# Altium PCB SDC_V3.0.PcbDoc (part 3 of 4)
Units mm, origin at the board's own origin, x right, y up, seen from the top; angles counter-clockwise.
Board outline 130 x 100 mm, 4 copper layers (Top Layer, Ground Plane, Power Plane, Bottom Layer), stack 1.466 mm thick; 369 components, 219 nets, 1234 pads, 1046 vias.
Unrouted connection lines stored in the file: 2.
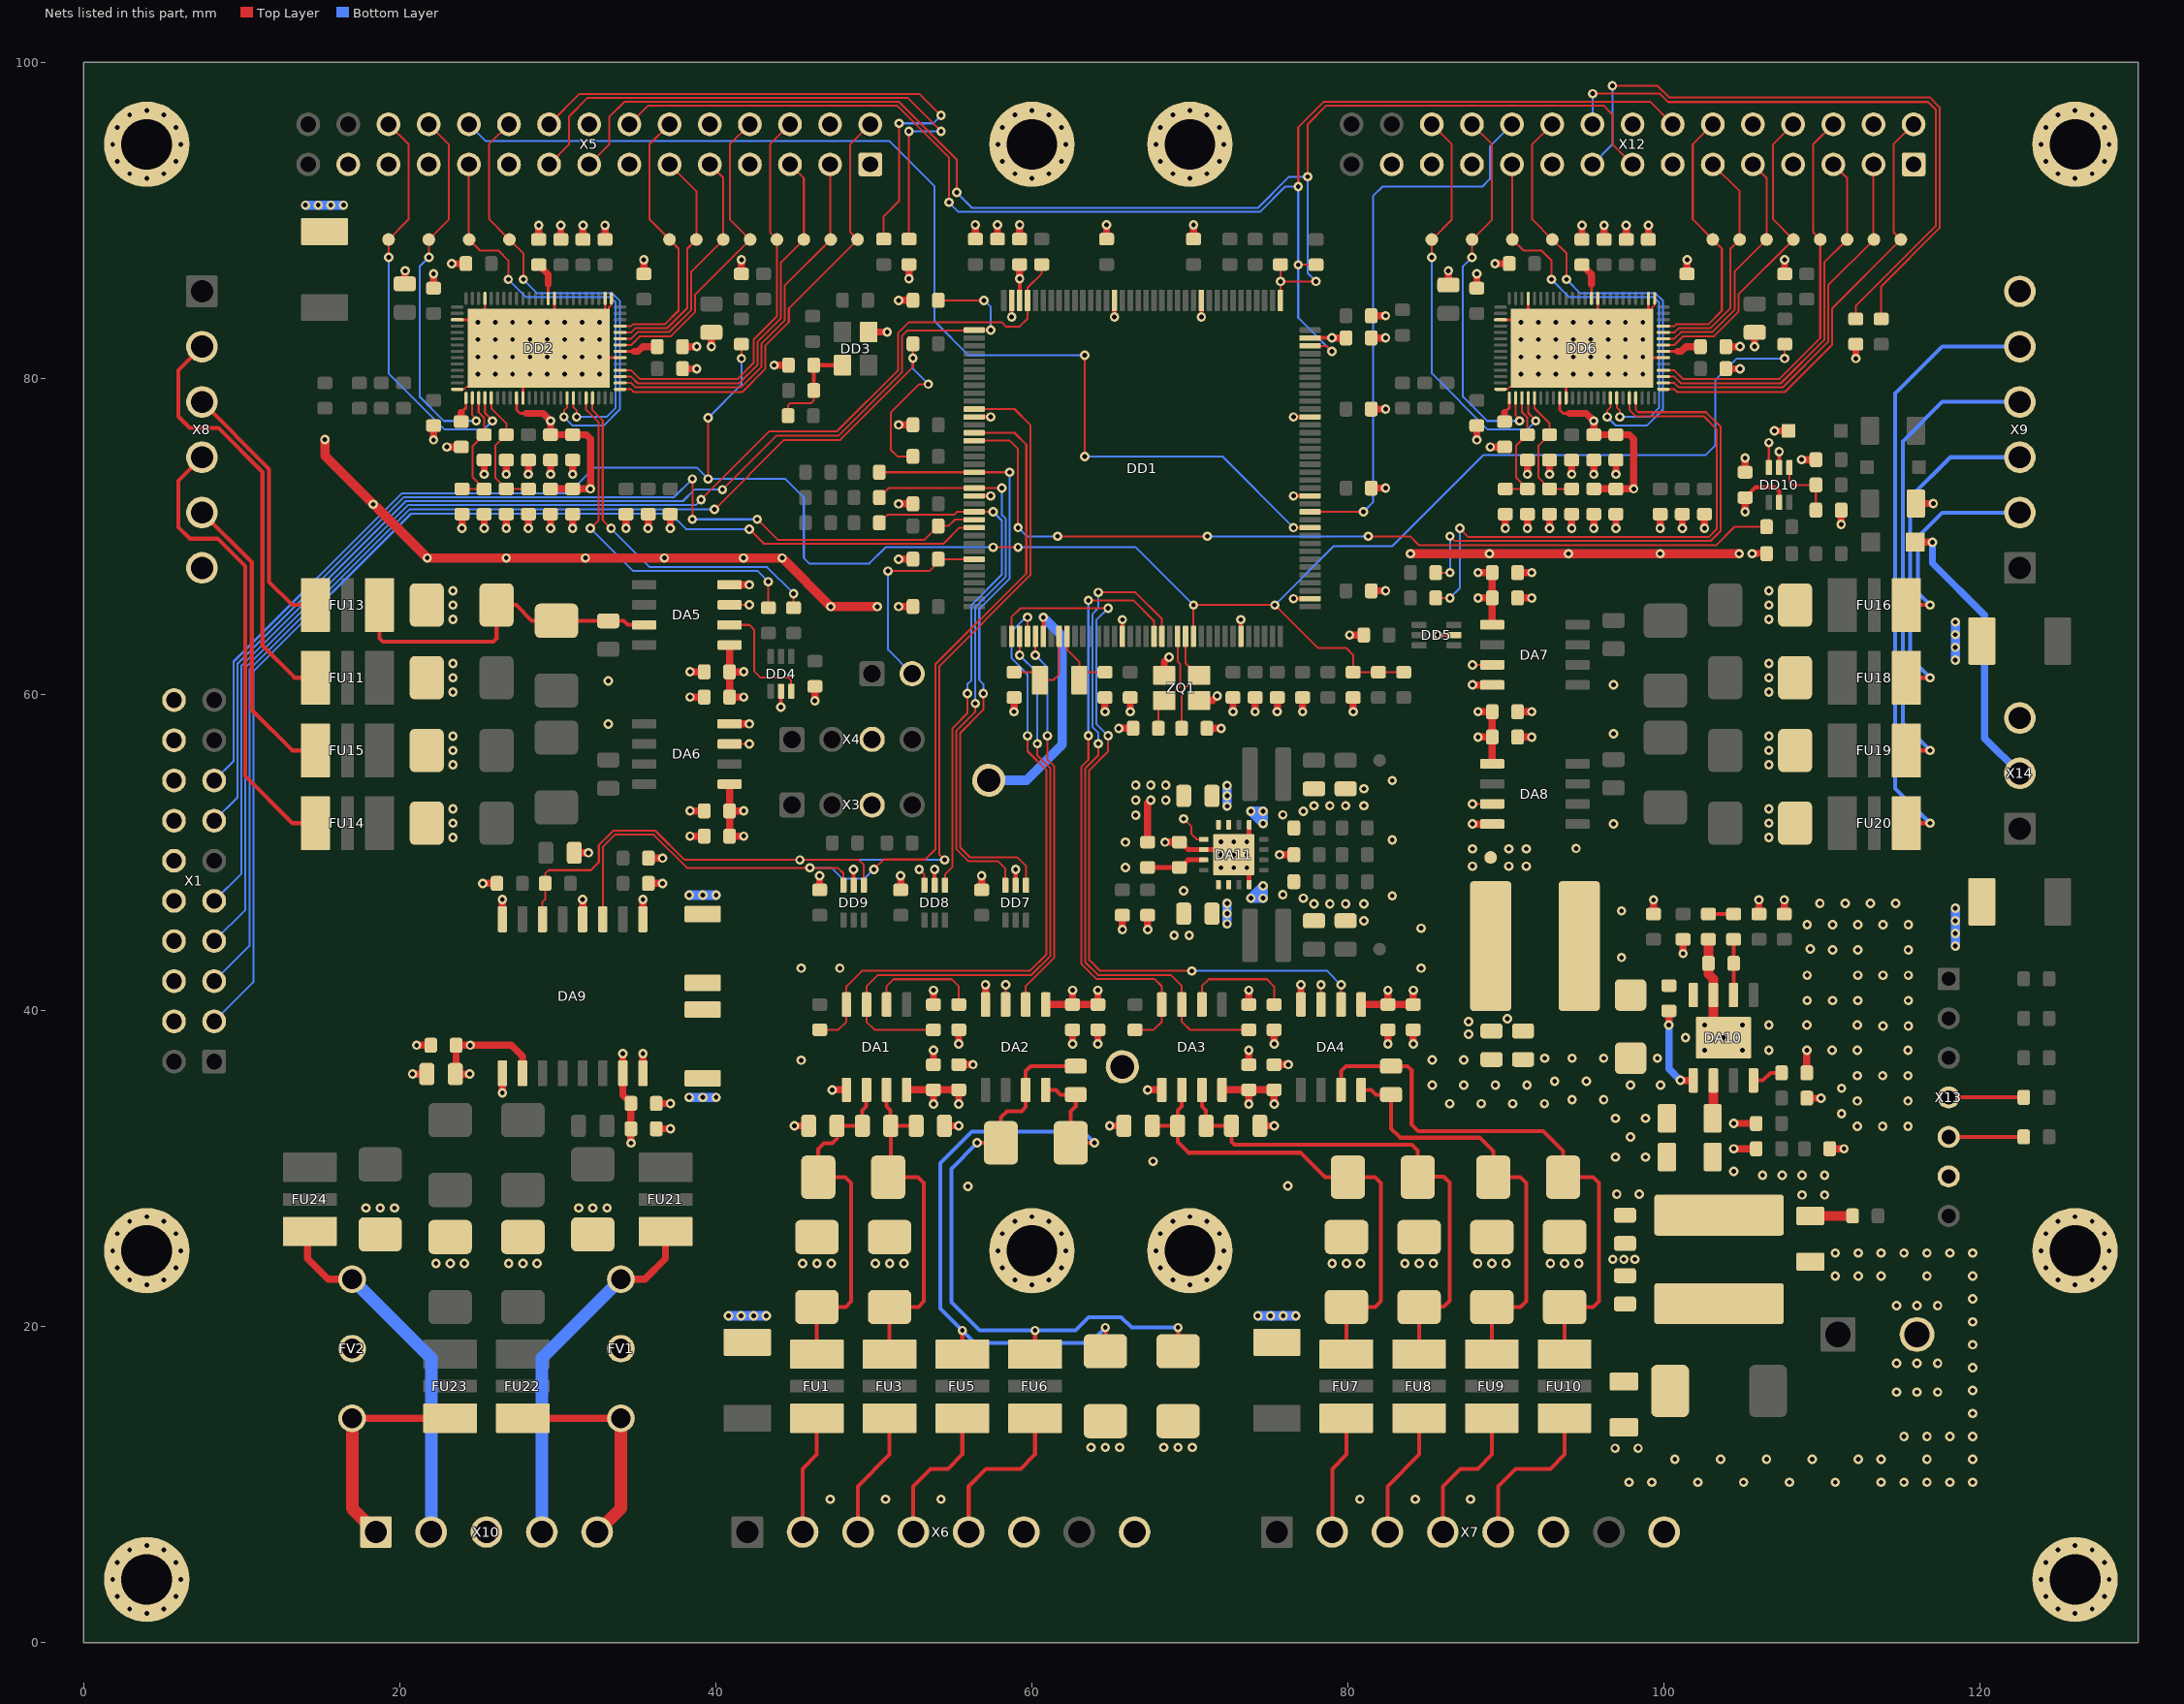
[diagram p4: the nets of this part, all layers, seen from the top]

## Via types
v1: diameter 0.6, hole 0.3, Top Layer to Bottom Layer, tented both sides, 989 vias
v2: diameter 0.6, hole 0.3, Top Layer to Bottom Layer, 57 vias

## Nets (pads, with @x,y where several pads share a name; then routed paths per layer and width w, separated by ;. In a path a pad name is that pad's centre, name@x,y a point inside that pad or via, vN(x,y) a via of type N, cw(c..) or ccw(c..) an arc to the next point about the centre after c; other vN are vias at no path point) (continued)
+5V: C44.2 C45.2 C46.2 C47.2 C48.2 C49.2 C50.2 C51.2 C52.2 C53.2 C55.2 C56.2 C57.2 C58.2 C60.2 C61.2 C79.2 C80.2 C84.2 C88.2 C113.2 DA1.8 DA2.1 DA3.8 DA4.1 DA5.1 DA6.1 DA7.1 DA8.1 DA11.1 DA11.2 DA11.11 DA11.12 DA11.13 DD10.5 FU2.1 FU4.1 FU12.1 FU17.1 HL4.2 L3.1 L5.2 L8.1 R37.2 R38.2 R44.2 R45.2 R66.1 R71.2 R72.2 TP13.1 X5.4 X12.4 | length 67.4
  Top Layer w0.125: v1(69.6,52.125) 70.1,51.625 70.1,51.15 70.425,50.825 DA11.13@70.875,50.825
  Top Layer w0.25: C113.2@105.125,72.45 105.775,73.1 107,73.1 107.275,72.825 DD10.5@107.275,72.15
  Top Layer w0.45: v1(29.55,70.5) L3.1@29.55,71.4 ; DA6.1@40.875,54.32 C56.2@40.875,52.625 ; DA5.1@40.875,63.12 C53.2@40.875,61.425 ; v1(41.775,51.025) C55.2@40.875,51.025 C56.2@40.875,52.625 ; v1(41.775,52.625) C56.2@40.875,52.625 ; v1(41.775,59.825) C52.2@40.875,59.825 C53.2@40.875,61.425 ; v1(41.775,61.425) C53.2@40.875,61.425 ; v1(44.975,32.7) R37.2@45.875,32.7 ; DA1.8@52.08,34.975 C45.2@53.775,34.975 ; v1(53.775,34.075) C45.2@53.775,34.975 ; v1(55.375,34.075) C44.2@55.375,34.975 C45.2@53.775,34.975 ; v1(55.375,37.875) R38.2@55.375,38.775 ; DA2.1@60.88,40.375 C47.2@62.575,40.375 ; v1(62.575,41.275) C47.2@62.575,40.375 ; v1(64.175,41.275) C46.2@64.175,40.375 C47.2@62.575,40.375 ; v1(64.925,32.7) R44.2@65.825,32.7 ; v1(67.325,45.125) R71.2@67.325,46.025 ; R72.2@67.325,50.65 67.325,53.1 v1(67.525,53.3) ; DA3.8@72.03,34.975 C49.2@73.725,34.975 ; v1(73.725,34.075) C49.2@73.725,34.975 ; v1(75.325,34.075) C48.2@75.325,34.975 C49.2@73.725,34.975 ; v1(75.325,37.875) R45.2@75.325,38.775 ; DA4.1@80.83,40.375 C51.2@82.525,40.375 ; v1(82.525,41.275) C51.2@82.525,40.375 ; v1(84.125,41.275) C50.2@84.125,40.375 C51.2@82.525,40.375 ; v1(88.225,57.3) C61.2@89.125,57.3 ; v1(88.225,58.9) C60.2@89.125,58.9 C61.2@89.125,57.3 ; v1(88.225,66.1) C58.2@89.125,66.1 ; v1(88.225,67.7) C57.2@89.125,67.7 C58.2@89.125,66.1 ; DA8.1@89.125,55.605 C61.2@89.125,57.3 ; DA7.1@89.125,64.405 C58.2@89.125,66.1 ; v1(95.55,70.5) L8.1@95.55,71.4 ; HL4.2@99.325,46.1 v1(99.325,47) ; v1(105.125,71.55) C113.2@105.125,72.45 ; R66.1@107.6,46.1 v1(107.6,47)
  Bottom Layer w0.6: v1(14.05,90.95) v1(14.85,90.95) v1(15.65,90.95) v1(16.45,90.95) ; v1(40.8,20.675) v1(41.6,20.675) v1(42.4,20.675) v1(43.2,20.675) ; v1(74.3,20.675) v1(75.1,20.675) v1(75.9,20.675) v1(76.7,20.675) ; v1(118.425,62.175) v1(118.425,62.975) v1(118.425,63.775) v1(118.425,64.575)
  other v1: 87.625,38.5 87.625,39.3 90.075,39.475 69,44.75 69.95,44.75 69.6,47.575 87.875,49.125 90.175,49.125 91.275,49.125 87.875,50.225 90.175,50.225 91.275,50.225 66.575,52.35 66.575,53.3 68.475,53.3 66.575,54.25 67.525,54.25 68.475,54.25
+5V_REFA: C40.2 C41.2 C42.2 DD2.23 L3.2 R22.2 R31.2 | length 14.2
  Top Layer w0.17: DD2.23@27.4,78.75 27.4,78 27.625,77.775 28,77.775
  Top Layer w0.45: v1(25.35,70.5) R22.2@25.35,71.4 ; 28,77.775 29.075,77.775 v1(29.55,77.3) C41.2@29.55,76.425 C42.2@30.95,76.425 31.8,76.425 32.075,76.15 v1(32.075,73) C40.2@30.95,73 L3.2@29.55,73 ; v1(28.15,70.5) R31.2@28.15,71.4
+5V_REFB: C105.2 C106.2 C107.2 DD6.23 L8.2 R80.2 R89.2 | length 14.1
  Top Layer w0.17: DD6.23@93.4,78.65 93.4,78 93.625,77.775 94,77.775
  Top Layer w0.45: v1(91.35,70.5) R80.2@91.35,71.4 ; 94,77.775 95.075,77.775 v1(95.55,77.3) C106.2@95.55,76.425 C107.2@96.95,76.425 97.8,76.425 98.075,76.15 v1(98.075,73) C105.2@96.95,73 L8.2@95.55,73 ; v1(94.15,70.5) R89.2@94.15,71.4
+24V: C74.2 C75.2 C77.2 C78.2 DA10.2 L4.2 R61.2 R64.1 R100.2 X5.7 X12.7 | length 7.6
  Top Layer w0.45: v1(104.4,31.25) R61.2@105.825,31.25 ; v1(104.4,32.85) R64.1@105.825,32.85
  Top Layer w0.6: C77.2@103.115,33.19 DA10.2@103.115,35.575 ; C75.2@109.54,27 R100.2@111.925,27
  other v1: 108.725,28.325 110.15,28.325 97,28.375 98.425,28.375 106.225,29.575 107.475,29.575 108.725,29.575 110.15,29.575 104.4,29.825
+24V_FUSE: FU25.2 | length 2.4
  Bottom Layer w0.6: v1(118.425,44.075) v1(118.425,44.875) v1(118.425,45.675) v1(118.425,46.475)
+VISO: C66.1 C67.2 C68.2 C69.2 DA9.10 DA9.15 | length 14.2
  Top Layer w0.45: v1(24.425,35.975) C69.2@23.525,35.975 23.575,36.025 C68.2@23.575,37.8 v1(24.475,37.8) 27.075,37.8 27.775,37.1 DA9.10@27.775,36.025 ; v1(34.125,37.27) DA9.15@34.125,36.025 34.125,34.65 34.637,34.138 C66.1@34.637,34.112 C67.2@34.637,32.512 v1(34.637,31.612)
A_EEPROM_A0: R25.1 X5.18 | length 36.7
  Top Layer w0.125: X5.18@29.46,96.07 31.383,97.993 52.882,97.993 v1(54.25,96.625) ; R25.1@50.625,88.8 50.625,90.25 51.6,91.225 v1(51.6,96.125)
  Bottom Layer w0.125: v1(51.6,96.125) 53.75,96.125 v1(54.25,96.625)
A_EEPROM_A1: R27.1 X5.17 | length 37.3
  Top Layer w0.125: X5.17@29.46,93.53 30.73,94.8 30.73,96.57 31.902,97.743 52.132,97.743 v1(54.25,95.625) ; R27.1@52.225,88.8 v1(52.225,95.625)
  Bottom Layer w0.125: v1(52.225,95.625) v1(54.25,95.625)
A_I0_N: C38.2 DD2.17 R22.1 R23.2 | length 7.9
  Top Layer w0.125: R23.2@23.95,73 R22.1@25.35,73 24.625,73.725 24.625,75.722 25.328,76.425 C38.2@25.35,76.425 25.35,77.5 25,77.85 DD2.17@25,78.75
A_I0_P: DD2.16 TP11.1 X5.24 | length 24.3
  Top Layer w0.125: X5.24@21.84,96.07 23.11,94.8 23.11,90.035 TP11.1@21.85,88.775 ; TP11.1@21.847,88.778 TP11.1@21.85,88.775 ; v1(21.85,87.65) TP11.1@21.85,88.775 ; DD2.16@24.6,78.75 24.6,77.679 24.85,77.429 v1(24.85,77.3)
  Bottom Layer w0.125: v1(21.85,87.65) 21.275,87.075 21.275,78.825 22.8,77.3 v1(24.85,77.3)
A_I1_N: C39.2 DD2.19 R31.1 R34.2 | length 8.1
  Top Layer w0.125: DD2.19@25.8,78.75 25.8,78.1 26.75,77.15 C39.2@26.75,76.425 ; C39.2@26.728,76.425 26.05,75.747 26.05,73.7 R34.2@26.75,73 R31.1@28.15,73
A_I1_P: DD2.18 TP12.1 X5.26 | length 26.6
  Top Layer w0.125: TP12.1@19.3,88.775 19.302,88.778 20.57,90.045 20.57,94.8 X5.26@19.3,96.07 ; v1(19.305,87.65) TP12.1@19.305,88.775 ; DD2.18@25.4,78.75 25.4,77.806 v1@25.816,77.391
  Bottom Layer w0.125: v1(19.305,87.65) 19.305,80.295 22.85,76.75 25.325,76.75 v1(25.875,77.3)
A_I_COMMON: DD1.47 X5.22 | length 72.5
  Top Layer w0.125: v1(63.35,75.05) v1(63.35,81.45) ; v1(76.55,70.55) DD1.47@77.6,70.55
  Bottom Layer w0.125: X5.22@24.38,96.07 25.45,95 47.6,95 51,95 53.85,92.15 53.85,83.6 56,81.45 v1(63.35,81.45) ; v1(63.35,75.05) 72.05,75.05 v1(76.55,70.55)
A_PWM_UX1_H: DD2.39 TP1.1 X5.2 | length 28.5
  Top Layer w0.125: DD2.39@33.95,79.3 34.65,79.3 34.825,79.125 41.675,79.125 43.15,80.6 43.15,82.075 44.625,83.55 44.625,84.425 TP1.1@48.975,88.775 48.51,89.24 48.51,94.8 X5.2@49.78,96.07
A_PWM_UX1_L: DD2.40 TP2.1 X5.3 | length 24.2
  Top Layer w0.125: DD2.40@33.95,79.7 34.65,79.7 34.925,79.425 41.6,79.425 42.9,80.725 42.9,82.2 44.375,83.675 44.375,85.875 TP2.1@47.275,88.775 47.24,88.81 X5.3@47.24,93.53
A_PWM_VX2_H: DD2.41 TP3.1 X5.5 | length 23.6
  Top Layer w0.125: DD2.41@33.95,80.1 34.65,80.1 35.075,79.675 41.475,79.675 42.65,80.85 42.65,82.325 44.125,83.8 44.125,85.979 44.125,87.325 TP3.1@45.575,88.775 45.575,92.655 X5.5@44.7,93.53
A_PWM_VX2_L: DD2.42 TP4.1 X5.6 | length 25.5
  Top Layer w0.125: DD2.42@33.95,80.5 34.65,80.5 35.213,79.938 41.363,79.938 42.4,80.975 42.4,82.45 43.875,83.925 43.875,86.082 TP4.1@43.875,88.775 43.43,89.22 43.43,94.8 X5.6@44.7,96.07
A_PWM_WY1_H: DD2.46 TP5.1 X5.8 | length 20
  Top Layer w0.125: DD2.46@33.95,82.1 34.65,82.1 35.212,82.663 37.162,82.663 38.7,84.2 38.7,85.3 TP5.1@42.175,88.775 ; X5.8@42.16,96.07 40.89,94.8 40.89,90.06 TP5.1@42.175,88.775 ; TP5.1@42.17,88.78 TP5.1@42.175,88.775
A_PWM_WY1_L: DD2.47 TP6.1 X5.9 | length 15.7
  Top Layer w0.125: DD2.47@33.95,82.5 34.65,82.5 35.063,82.913 37.038,82.913 38.45,84.325 38.45,86.75 TP6.1@40.475,88.775 40.475,92.675 X5.9@39.62,93.53
A_PWM_Y2_H: DD2.48 TP7.1 X5.11 | length 14.9
  Top Layer w0.125: DD2.48@33.95,82.9 34.65,82.9 34.913,83.163 36.913,83.163 38.2,84.45 38.2,88.2 TP7.1@38.775,88.775 38.775,91.835 X5.11@37.08,93.53
A_PWM_Y2_L: DD2.49 TP8.1 X5.12 | length 17.2
  Top Layer w0.125: DD2.49@33.95,83.3 34.65,83.3 34.763,83.413 36.788,83.413 37.65,84.275 37.65,88.2 TP8.1@37.075,88.775 37.08,88.78 35.81,90.05 35.81,94.8 X5.12@37.08,96.07
ABS_ENC_1_CK: DA1.4 DD1.4 R41.1 | length 41.6
  Top Layer w0.125: R41.1@46.575,38.775 47.76,38.775 48.27,39.285 DA1.4@48.27,40.375 48.27,41.52 49.25,42.5 50.171,42.5 59.868,42.5 60.925,43.557 60.925,55.2 59.725,56.4 v1(59.725,57.375) ; DD1.4@59.725,63.675 v1(59.725,64.875)
  Bottom Layer w0.125: v1(59.725,57.375) 59.725,61.275 58.7,62.3 58.7,63.95 59.625,64.875 v1(59.725,64.875)
ABS_ENC_1_CK_N: FU3.3 X6.3 | length 8
  Top Layer w0.25: X6.3@49,7 49,9.9 51,11.9 FU3.3@51,14.2
ABS_ENC_1_CK_P: FU1.3 X6.2 | length 7.6
  Top Layer w0.25: X6.2@45.5,7 45.5,11 46.4,11.9 FU1.3@46.4,14.2
ABS_ENC_1_DATA: DA2.2 DD1.5 | length 24.5
  Top Layer w0.125: DA2.2@59.61,40.375 59.61,41.535 61.425,43.35 61.425,55.425 60.975,55.875 v1(60.975,57.375) ; v1(60.225,62.475) DD1.5@60.225,63.675
  Bottom Layer w0.125: v1(60.225,62.475) 60.975,61.725 v1(60.975,57.375)
ABS_ENC_1_DATA_N: FU6.3 X6.5 | length 10.2
  Top Layer w0.25: X6.5@56,7 56,9.9 57.1,11 59.3,11 60.2,11.9 FU6.3@60.2,14.2
ABS_ENC_1_DATA_P: FU5.3 X6.4 | length 9.1
  Top Layer w0.25: X6.4@52.5,7 52.5,9.9 53.6,11 54.7,11 55.6,11.9 FU5.3@55.6,14.2
ABS_ENC_1_FS: DA1.3 DD1.3 R42.1 | length 40.1
  Top Layer w0.125: R42.1@53.775,38.775 50.05,38.775 49.54,39.285 DA1.3@49.54,40.375 49.54,41.515 50.275,42.25 59.971,42.25 61.175,43.454 61.175,55.304 60.35,56.129 v1(60.35,56.875) ; v1(59.225,62.475) DD1.3@59.225,63.675
  Bottom Layer w0.125: v1(59.225,62.475) 60.35,61.35 v1(60.35,56.875)
ABS_ENC_2_CK: DA3.4 DD1.20 R48.1 | length 38.7
  Top Layer w0.125: v1(63.575,57.375) 63.575,55.858 63.125,55.408 63.125,42.946 64.071,42 67.75,42 68.22,41.53 DA3.4@68.22,40.375 68.22,39.285 67.71,38.775 R48.1@66.525,38.775 ; v1(63.575,65.95) 66.425,65.95 67.725,64.65 DD1.20@67.725,63.675
  Bottom Layer w0.125: v1(63.575,57.375) v1(63.575,65.95)
ABS_ENC_2_CK_N: FU8.3 X7.3 | length 8
  Top Layer w0.25: X7.3@82.5,7 82.5,9.9 84.5,11.9 FU8.3@84.5,14.2
ABS_ENC_2_CK_P: FU7.3 X7.2 | length 7.6
  Top Layer w0.25: X7.2@79,7 79,11 79.9,11.9 FU7.3@79.9,14.2
ABS_ENC_2_DATA: DA4.2 DD1.2 | length 48.8
  Top Layer w0.125: DD1.2@58.725,63.675 58.725,64.9 59.275,65.45 v1(64.825,65.45) ; v1(64.825,57.375) 64.825,56.4 63.625,55.2 63.625,43.2 64.325,42.5 v1(70.125,42.5) ; DA4.2@79.56,40.375 v1(79.56,41.62)
  Bottom Layer w0.125: v1(64.825,57.375) 64.075,58.125 64.075,64.7 v1(64.825,65.45) ; v1(70.125,42.5) 78.68,42.5 v1(79.56,41.62)
ABS_ENC_2_DATA_N: FU10.3 X7.5 | length 10.2
  Top Layer w0.25: X7.5@89.5,7 89.5,9.9 90.6,11 92.8,11 93.7,11.9 FU10.3@93.7,14.2
ABS_ENC_2_DATA_P: FU9.3 X7.4 | length 9.1
  Top Layer w0.25: X7.4@86,7 86,9.9 87.1,11 88.2,11 89.1,11.9 FU9.3@89.1,14.2
ABS_ENC_2_FS: DA3.3 DD1.21 R49.1 | length 43.3
  Top Layer w0.125: v1(64.2,56.875) 64.2,56.129 63.375,55.304 63.375,43.05 64.175,42.25 68.775,42.25 69.49,41.535 DA3.3@69.49,40.375 69.49,39.285 70,38.775 R49.1@73.725,38.775 ; v1(64.2,66.45) 66.55,66.45 68.225,64.775 DD1.21@68.225,63.675
  Bottom Layer w0.125: v1(64.2,56.875) 64.2,57.575 63.825,57.95 63.825,65.075 64.2,65.45 v1(64.2,66.45)
B_EEPROM_A0: R85.1 X12.18 | length 39.4
  Top Layer w0.125: v1(95.475,98) 99.725,98 100.25,97.475 116.7,97.475 117.175,97 117.175,89.625 112.125,84.575 R85.1@112.125,83.75
  Bottom Layer w0.125: X12.18@95.46,96.07 95.475,96.085 v1(95.475,98)
B_EEPROM_A1: R83.1 X12.17 | length 41.7
  Top Layer w0.125: v1(96.725,98.5) 99.579,98.5 100.304,97.775 116.8,97.775 117.425,97.15 117.425,89.5 113.725,85.8 R83.1@113.725,83.75
  Bottom Layer w0.125: X12.17@95.46,93.53 96.725,94.795 v1(96.725,98.5)
B_I0_N: C103.2 DD6.17 R80.1 R81.2 | length 7.8
  Top Layer w0.125: R81.2@89.95,73 R80.1@91.35,73 90.625,73.725 90.625,75.722 91.328,76.425 C103.2@91.35,76.425 91.35,77.5 91,77.85 DD6.17@91,78.65
B_I0_P: DD6.16 TP26.1 X12.24 | length 24.2
  Top Layer w0.125: X12.24@87.84,96.07 89.11,94.8 89.11,90.035 TP26.1@87.85,88.775 v1(87.85,87.65) ; DD6.16@90.6,78.65 90.6,77.679 90.85,77.429 v1(90.85,77.3)
  Bottom Layer w0.125: v1(87.85,87.65) 87.275,87.075 87.275,78.825 88.8,77.3 v1(90.85,77.3)
B_I1_N: C104.2 DD6.19 R89.1 R92.2 | length 8
  Top Layer w0.125: DD6.19@91.8,78.65 91.8,78.1 92.75,77.15 C104.2@92.75,76.425 ; C104.2@92.728,76.425 92.05,75.747 92.05,73.7 R92.2@92.75,73 R89.1@94.15,73
B_I1_P: DD6.18 TP27.1 X12.26 | length 26.5
  Top Layer w0.125: X12.26@85.3,96.07 86.57,94.8 86.57,90.04 85.305,88.775 v1(85.305,87.65) ; DD6.18@91.4,78.65 91.4,77.806 v1@91.816,77.391
  Bottom Layer w0.125: v1(85.305,87.65) 85.305,80.295 88.85,76.75 91.325,76.75 v1(91.875,77.3)
B_I_COMMON: DD1.49 X12.22 | length 35.5
  Top Layer w0.125: DD1.49@77.6,71.55 v1(80.975,71.55)
  Bottom Layer w0.125: v1(80.975,71.55) 81.6,72.175 81.6,91.55 82.175,92.125 88.5,92.125 88.965,92.59 88.965,94.655 X12.22@90.38,96.07
B_PWM_UX1_H: DD6.39 TP16.1 X12.2 | length 28.5
  Top Layer w0.125: DD6.39@99.95,79.3 100.65,79.3 100.825,79.125 107.625,79.125 110.625,82.125 110.625,84.425 TP16.1@114.975,88.775 114.51,89.24 114.51,94.8 X12.2@115.78,96.07
B_PWM_UX1_L: DD6.40 TP17.1 X12.3 | length 24.1
  Top Layer w0.125: DD6.40@99.95,79.7 100.65,79.7 100.925,79.425 107.5,79.425 110.375,82.3 110.375,85.875 TP17.1@113.275,88.775 ; TP17.1@113.24,88.81 X12.3@113.24,93.53
B_PWM_VX2_H: DD6.41 TP18.1 X12.5 | length 23.6
  Top Layer w0.125: DD6.41@99.95,80.1 100.65,80.1 101.075,79.675 107.375,79.675 110.125,82.425 110.125,87.325 TP18.1@111.575,88.775 111.575,92.655 X12.5@110.7,93.53
B_PWM_VX2_L: DD6.42 TP19.1 X12.6 | length 25.5
  Top Layer w0.125: DD6.42@99.95,80.5 100.65,80.5 101.213,79.938 107.262,79.938 109.875,82.55 TP19.1@109.875,88.775 109.43,89.22 109.43,94.8 X12.6@110.7,96.07
B_PWM_WY1_H: DD6.46 TP20.1 X12.8 | length 20
  Top Layer w0.125: DD6.46@99.95,82.1 100.65,82.1 101.213,82.663 103.163,82.663 104.7,84.2 104.7,85.3 TP20.1@108.175,88.775 106.89,90.06 106.89,94.8 X12.8@108.16,96.07
B_PWM_WY1_L: DD6.47 TP21.1 X12.9 | length 15.7
  Top Layer w0.125: DD6.47@99.95,82.5 100.65,82.5 101.063,82.913 103.038,82.913 104.45,84.325 104.45,86.75 TP21.1@106.475,88.775 106.475,92.675 X12.9@105.62,93.53
B_PWM_Y2_H: DD6.48 TP22.1 X12.11 | length 14.9
  Top Layer w0.125: DD6.48@99.95,82.9 100.65,82.9 100.913,83.163 102.913,83.163 104.2,84.45 104.2,88.2 TP22.1@104.775,88.775 ; X12.11@103.08,93.53 104.775,91.835 TP22.1@104.775,88.775
B_PWM_Y2_L: DD6.49 TP23.1 X12.12 | length 17.2
  Top Layer w0.125: DD6.49@99.95,83.3 100.65,83.3 100.763,83.413 102.788,83.413 103.65,84.275 103.65,88.2 TP23.1@103.075,88.775 103.08,88.78 101.81,90.05 101.81,94.8 X12.12@103.08,96.07
BOOT0: DD1.138 R1.1 X2.2 | length 13
  Top Layer w0.125: v1(50.9,67.8) 53.525,67.8 54.075,68.35 R1.1@54.075,68.55 DD1.138@56.35,68.55
  Bottom Layer w0.125: v1(50.9,67.8) 50.9,62.82 X2.2@52.42,61.3
BRAKE_A: DD2.31 TP9.1 X5.20 | length 30.2
  Top Layer w0.125: X5.20@26.92,96.07 25.65,94.8 25.65,90.075 TP9.1@26.95,88.775 27.825,87.9 v1(27.825,86.25) ; v1@30.403,77.553 30.403,77.964 30.6,78.161 DD2.31@30.6,78.75
  Bottom Layer w0.125: v1(27.825,86.25) 28.7,85.375 33.45,85.375 33.925,84.9 33.925,78.021 32.904,77 30.95,77 v1(30.4,77.55)
BRAKE_B: DD6.31 TP24.1 X12.20 | length 30.2
  Top Layer w0.125: X12.20@92.92,96.07 91.65,94.8 91.65,90.05 TP24.1@92.925,88.775 ; TP24.1@92.95,88.775 93.825,87.9 v1(93.825,86.25) ; v1@96.403,77.553 96.403,77.964 96.6,78.161 DD6.31@96.6,78.75
  Bottom Layer w0.125: v1(93.825,86.25) 94.7,85.375 99.45,85.375 99.925,84.9 99.925,78.021 98.904,77 96.95,77 v1(96.4,77.55)
CCW_BTN_1: DD1.123 R104.1 | length 56.3
  Top Layer w0.125: DD1.123@56.35,76.05 58.6,76.05 59.125,75.525 v1(59.125,70.55) ; v1(61.625,70) v1(71.1,70) ; v1(81.275,70) 83.925,70 84.5,69.425 103.275,69.425 104.45,70.6 R104.1@106.475,70.6
  Bottom Layer w0.125: v1(59.125,70.55) 59.675,70 v1(61.625,70) ; v1(71.1,70) v1(81.275,70)
CTRL_422_A: FU21.3 FV1.1 X10.4 | length 23.2
  Top Layer w0.45: FV1.1@34,23 35.525,23 36.825,24.3 FU21.3@36.825,26.025
  Bottom Layer w0.8: X10.4@29,7 29,18 FV1.1@34,23
CTRL_422_B: FU22.3 FV1.3 X10.5 | length 14
  Top Layer w0.45: FU22.3@27.8,14.2 FV1.3@34,14.2
  Top Layer w0.8: X10.5@32.5,7 34,8.5 FV1.3@34,14.2
CTRL_422_RX: DA9.3 DD1.122 DD9.3 | length 62.5
  Top Layer w0.125: DA9.3@32.855,45.775 32.855,50.355 33.625,51.125 36.075,51.125 38.175,49.025 v1(45.95,49.025) 47.725,49.025 48.075,48.675 DD9.3@48.075,47.925 ; v1(50,48.925) 50.625,49.55 53.25,49.55 53.9,50.2 53.9,61.9 59.65,67.65 59.65,75.8 58.9,76.55 DD1.122@56.35,76.55
  Bottom Layer w0.125: v1(45.95,49.025) 47.325,49.025 48,48.35 49.425,48.35 v1(50,48.925)
CTRL_422_TX: DA9.6 DD1.119 DD9.1 R60.1 | length 70
  Top Layer w0.125: DA9.6@29.045,45.775 29.045,46.87 29.225,47.05 R60.1@29.225,47.8 ; R60.1@29.212,48.037 29.212,48.662 29.425,48.875 32.1,48.875 32.605,49.38 32.605,50.459 33.521,51.375 36.179,51.375 38.029,49.525 v1(45.325,49.525) 49.05,49.525 49.375,49.2 DD9.1@49.375,47.925 ; v1(54.475,49.525) 54.15,49.85 54.15,51.65 54.15,61.796 59.902,67.548 59.9,67.55 59.9,77.05 58.9,78.05 DD1.119@56.35,78.05
  Bottom Layer w0.125: v1(45.325,49.525) v1(54.475,49.525)
CTRL_422_Y: FU23.3 FV2.1 X10.1 | length 14
  Top Layer w0.45: FV2.1@17,14.2 FU23.3@23.2,14.2
  Top Layer w0.8: FV2.1@17,14.2 17,8.5 X10.1@18.5,7
CTRL_422_Z: FU24.3 FV2.3 X10.2 | length 23.2
  Top Layer w0.45: FU24.3@14.175,26.025 14.175,24.3 15.475,23 FV2.3@17,23
  Bottom Layer w0.8: FV2.3@17,23 22,18 X10.2@22,7
CTRL_RX_LED_A: R99.2 X13.4 | length 4.7
  Top Layer w0.25: X13.4@118,34.5 R99.2@122.75,34.5
CTRL_TX_LED_A: R98.2 X13.5 | length 4.7
  Top Layer w0.25: X13.5@118,32 R98.2@122.75,32
DRV_A_EN: DD2.32 TP10.1 X5.21 | length 27.1
  Top Layer w0.125: X5.21@24.38,93.53 24.38,88.795 TP10.1@24.4,88.775 25.1,88.075 26.25,88.075 26.875,87.45 v1(26.875,86.25) ; DD2.32@31,78.75 31,78.161 31.197,77.964 v1@31.197,77.553
  Bottom Layer w0.125: v1(26.875,86.25) 28,85.125 33.346,85.125 33.675,84.796 33.675,78.125 33.1,77.55 v1(31.2,77.55)
DRV_B_EN: DD6.32 TP25.1 X12.21 | length 27.1
  Top Layer w0.125: X12.21@90.38,93.53 90.38,88.795 TP25.1@90.4,88.775 91.1,88.075 92.25,88.075 92.875,87.45 v1(92.875,86.25) ; DD6.32@97,78.75 97,78.161 97.197,77.964 v1@97.197,77.553
  Bottom Layer w0.125: v1(92.875,86.25) 94,85.125 99.346,85.125 99.675,84.796 99.675,78.125 99.1,77.55 v1(97.2,77.55)
EEPROM_SCL: DD1.70 R15.2 X5.14 X12.14 | length 90.6
  Top Layer w0.125: X5.14@34.54,96.07 35.712,97.242 51.482,97.243 54.75,93.975 v1(54.75,91.125) ; v1(76.85,87.175) R15.2@77.975,87.175 ; v1(76.85,92.125) 76.85,95.879 78.471,97.5 99.11,97.5 X12.14@100.54,96.07 ; DD1.70@77.6,82.05 78.625,82.05 v1(78.975,81.7) v1@78.95,81.7
  Bottom Layer w0.125: v1(54.75,91.125) 55.35,90.525 74.425,90.525 76.025,92.125 v1(76.85,92.125) v1(76.85,87.175) 76.85,83.825 v1(78.975,81.7)
EEPROM_SDA: DD1.73 R16.2 X5.15 X12.15 | length 91.3
  Top Layer w0.125: X5.15@32,93.53 33.27,94.8 33.27,96.545 34.218,97.492 51.586,97.492 55.25,93.829 v1(55.25,91.75) ; DD1.73@75.725,84.925 v1(75.725,86.125) ; R16.2@75.725,87.2 v1(75.725,86.125) ; v1(77.45,92.75) 77.45,96.075 78.625,97.25 96.175,97.25 96.73,96.695 96.73,94.8 X12.15@98,93.53 ; v1(77.975,86.125) v1(75.725,86.125)
  Bottom Layer w0.125: v1(55.25,91.75) 56.225,90.775 74.3,90.775 76.275,92.75 v1(77.45,92.75) 77.45,86.65 v1(77.975,86.125)
END_SW: VD33.2 X14.2 | length 18
  Top Layer w0.45: VD33.2@115.875,69.625 v1(116.975,69.625)
  Bottom Layer w0.45: v1(116.975,69.625) 116.975,68.3 120.275,65 120.275,57.225 X14.2@122.5,55
GND: C1.2 C2.2 C3.1 C4.1 C5.1 C6.1 C7.2 C8.2 C9.1 C10.1 C11.1 C12.1 C13.1 C14.1 C15.1 C16.1 C17.1 C18.1 C19.1 C20.1 C21.1 C22.1 C23.1 C24.1 C25.1 C26.1 C27.1 C28.1 C29.2 C30.1 C31.1 C32.1 C33.1 C34.1 C35.1 C36.1 C37.1 C38.1 C39.1 C40.1 C41.1 C42.1 C43.1 C44.1 C45.1 C46.1 C47.1 C48.1 C49.1 C50.1 C51.1 C52.1 C53.1 C54.1 C55.1 C56.1 C57.1 C58.1 C59.1 C60.1 C61.1 C62.1 C63.2 C64.1 C65.1 C70.2 C72.1 C73.1 C74.1 C75.1 C77.1 C78.1 C79.1 C80.1 C81.1 C82.1 C83.1 C84.1 C85.1 C86.1 C87.1 C88.1 C89.1 C90.1 C91.1 C92.1 C93.1 C94.1 C95.1 C96.1 C97.1 C98.1 C99.1 C100.1 C101.1 C102.1 C103.1 C104.1 C105.1 C106.1 C107.1 C108.1 C109.1 C110.1 C111.1 C112.2 C113.1 DA1.5 DA2.3 DA2.4 DA3.5 DA4.3 DA4.4 DA5.3 DA5.4 DA6.3 DA6.4 DA7.3 DA7.4 DA8.3 DA8.4 DA9.1 DA9.4 DA9.8 DA10.7 DA10.9 DA11.4 DA11.9 DA11.14 DA11.17 DD1.16 DD1.31 DD1.38 DD1.51 DD1.61 DD1.83 DD1.94 DD1.107 DD1.120 DD1.130 DD2.3 DD2.14 DD2.24 DD2.44 DD2.53 DD2.54 DD2.62 DD2.73 DD2.77 DD3.2 DD4.2 DD5.2 DD6.3 DD6.14 DD6.24 DD6.44 DD6.53 DD6.54 DD6.62 DD6.73 DD6.77 DD7.2 DD8.2 DD8.3 DD9.2 DD10.2 DD10.3 HL6.1 MH1.1 MH2.1 MH3.1 MH4.1 MH5.1 MH6.1 MH7.1 MH8.1 MH9.1 MH10.1 R1.2 R13.2 R17.2 R18.2 R23.1 R27.2 R30.2 R32.2 R33.2 R34.1 R40.1 R42.2 R47.1 R49.2 R62.1 R63.1 R67.1 R68.2 R69.2 R74.2 R75.2 R77.2 R78.2 R79.2 R81.1 R85.2 R88.2 R90.2 R91.2 R92.1 R105.2 R106.2 VD1.2 VD3.2 VD4.2 VD6.2 VD7.2 VD9.2 VD10.2 VD12.2 VD13.2 VD15.2 VD16.2 VD18.2 VD19.2 VD21.2 VD22.2 VD24.2 VD32.2 VD35.2 X1.4 X1.6 X1.8 X1.10 X1.12 X1.14 X1.16 X1.18 X1.20 X3.3 X4.3 X5.1 X5.10 X5.13 X5.16 X5.19 X5.23 X5.25 X5.27 X6.6 X6.8 X7.6 X7.8 X8.6 X9.6 X11.2 X12.1 X12.10 X12.13 X12.16 X12.19 X12.23 X12.25 X12.27 X13.6 X14.3 ZQ1.2 | length 279.1
  Top Layer w0.125: DD2.14@23.65,79.3 24.068,79.3 24.243,79.475 25.275,79.475 v1(26.05,80.25) ; v1(32.65,82.45) 33.225,83.025 33.225,84.457 33.4,84.632 DD2.53@33.4,85.05 ; DA6.3@40.875,56.86 v1(42.12,56.86) ; DA5.3@40.875,65.66 v1(42.12,65.66) ; v1(52.875,48.925) 53.2,48.6 DD8.3@53.2,47.925 ; DA2.3@58.34,40.375 v1(58.34,41.62) ; DA4.3@78.29,40.375 v1(78.29,41.62) ; v1(87.88,53.065) DA8.3@89.125,53.065 ; v1(87.88,61.865) DA7.3@89.125,61.865 ; DD6.14@89.65,79.3 90.068,79.3 90.243,79.475 91.275,79.475 v1(92.05,80.25) ; v1(98.65,82.45) 99.225,83.025 99.225,84.457 99.4,84.632 DD6.53@99.4,85.05 ; DD10.3@106.625,74.35 v1(106.625,75.925)
  Top Layer w0.17: DD2.3@23.65,83.7 DD2.77@25.4,83.7 ; DD2.73@25.4,85.05 DD2.77@25.4,83.7 ; v1(26.05,82.45) 25.4,83.1 DD2.77@25.4,83.7 ; v1(27.15,83.55) 27,83.7 DD2.77@25.4,83.7 ; DD2.24@27.8,78.75 27.8,79.8 v1(28.25,80.25) ; v1(29.35,83.55) 29.8,84 DD2.62@29.8,85.05 ; v1(31.55,80.25) 32.6,81.3 DD2.44@33.95,81.3 ; v1(32.65,83.55) 33,83.9 DD2.54@33,85.05 ; DD6.3@89.65,83.7 DD6.77@91.4,83.7 ; DD6.73@91.4,85.05 DD6.77@91.4,83.7 ; v1(92.05,82.45) 91.4,83.1 DD6.77@91.4,83.7 ; v1(93.15,83.55) 93,83.7 DD6.77@91.4,83.7 ; DD6.24@93.8,78.75 93.8,79.8 v1(94.25,80.25) ; v1(94.25,82.45) DD6.77@94.8,81.9 ; v1(95.35,83.55) 95.8,84 DD6.62@95.8,85.05 ; v1(97.55,80.25) 98.6,81.3 DD6.44@99.95,81.3 ; v1(98.65,83.55) 99,83.9 DD6.54@99,85.05
  Top Layer w0.25: v1(44.125,59.2) DD4.2@44.125,60.2 ; DD9.2@48.725,47.925 v1(48.725,48.925) ; DD8.2@53.85,47.925 v1(53.85,48.925) ; DD1.130@56.35,72.55 v1(57.4,72.55) ; DD1.120@56.35,77.55 v1(57.4,77.55) ; v1(58.725,83.875) DD1.107@58.725,84.925 ; DD7.2@58.975,47.925 v1(58.975,48.925) ; v1(65.225,83.875) DD1.94@65.225,84.925 ; DD1.16@65.725,63.675 v1(65.725,64.725) ; v1(70.725,83.875) DD1.83@70.725,84.925 ; DD1.31@73.225,63.675 v1(73.225,64.725) ; v1(76.55,66.05) DD1.38@77.6,66.05 ; v1(76.55,72.55) DD1.51@77.6,72.55 ; v1(76.55,77.55) DD1.61@77.6,77.55 ; v1(85.7,63.75) DD5.2@86.7,63.75 ; DD10.2@107.275,74.35 v1(107.275,75.35)
  Top Layer w0.3: C87.1@69.405,50.65 69.88,50.175 DA11.14@70.875,50.175 71.625,50.175 v2(71.95,49.85) ; DA11.4@73.75,47.95 73.75,48.875 v2(73.6,49.025) v2(72.775,49.85) v2(73.6,50.675) 73.75,50.825 DA11.9@73.75,51.75
  Top Layer w0.45: C36.1@20.35,85.9 v1(20.35,86.8) ; v1(22.15,76.1) C31.1@22.15,77 ; C30.1@22.15,85.7 v1(22.15,86.6) ; v1(23,75.65) C26.1@23.9,75.65 ; v1(23.3,87.25) C35.1@24.2,87.25 ; v1(23.95,70.5) R23.1@23.95,71.4 ; v1(25.262,48.037) C65.1@26.162,48.037 ; v1(25.35,73.925) C38.1@25.35,74.825 ; DA9.8@26.505,45.775 v1(26.505,47.02) ; v1(26.75,70.5) R34.1@26.75,71.4 ; v1(26.75,73.925) C39.1@26.75,74.825 ; v1(28.15,73.925) C25.1@28.15,74.825 ; C28.1@28.8,88.775 v1(28.8,89.675) ; v1(29.55,73.925) C41.1@29.55,74.825 ; C34.1@30.2,88.775 v1(30.2,89.675) ; v1(30.95,70.5) C40.1@30.95,71.4 ; v1(30.95,73.925) C42.1@30.95,74.825 ; C64.1@31.05,49.975 v1(31.95,49.975) ; DA9.4@31.585,45.775 v1(31.585,47.02) ; R18.2@31.6,88.775 v1(31.6,89.675) ; R17.2@33,88.775 v1(33,89.675) ; v1(34.325,70.5) R30.2@34.325,71.4 ; DA9.1@35.395,45.775 v1(35.395,47.02) ; C33.1@35.45,86.6 v1(35.45,87.5) ; v1(35.725,70.5) R32.2@35.725,71.4 ; C63.2@35.737,48.037 v1(36.637,48.037) ; C62.1@35.737,49.637 v1(36.637,49.637) ; v1(37.125,70.5) R33.2@37.125,71.4 ; C32.1@37.9,80.6 v1(38.8,80.6) ; C27.1@37.9,82 v1(38.8,82) ; v1(38.375,51.025) C55.1@39.275,51.025 ; v1(38.375,52.625) C56.1@39.275,52.625 ; v1(38.375,59.825) C52.1@39.275,59.825 ; v1(38.375,61.425) C53.1@39.275,61.425 ; v1(39.725,82) C37.1@39.725,82.9 ; DA6.4@40.875,58.13 v1(42.12,58.13) ; DA5.4@40.875,66.93 v1(42.12,66.93) ; C43.1@41.625,86.6 v1(41.625,87.5) ; v1(43.7,80.825) C29.2@44.6,80.825 ; v1(46.275,59.6) C54.1@46.275,60.5 ; C111.1@46.575,47.625 v1(46.575,48.525) ; v1(47.37,34.975) DA1.5@48.27,34.975 ; DD3.2@49.675,82.925 v1(50.85,82.925) ; v1(51.575,65.55) C23.1@52.475,65.55 ; v1(51.575,68.55) R1.2@52.475,68.55 ; v1(51.575,72.05) C22.1@52.475,72.05 ; v1(51.575,77.05) C21.1@52.475,77.05 ; v1(51.575,84.925) R13.2@52.475,84.925 ; C110.1@51.7,47.625 v1(51.7,48.525) ; v1(52.225,86.3) R27.2@52.225,87.2 ; C45.1@53.775,36.575 v1(53.775,37.475) ; R42.2@53.775,40.375 v1(53.775,41.275) ; R40.1@54.475,32.7 v1(55.375,32.7) ; C44.1@55.375,36.575 v1(56.275,36.575) ; C24.1@56.425,88.8 v1(56.425,89.7) ; C109.1@56.825,47.625 v1(56.825,48.525) ; DA2.4@57.07,40.375 v1(57.07,41.62) ; C20.1@57.825,88.8 v1(57.825,89.7) ; v1(58.875,58.9) C7.2@58.875,59.8 ; C6.1@59.225,88.8 v1(59.225,89.7) ; v1(62.575,37.875) C47.1@62.575,38.775 ; v1(64.175,37.875) C46.1@64.175,38.775 ; v1(64.625,58.9) C8.2@64.625,59.8 ; C19.1@64.725,88.8 v1(64.725,89.7) ; v1(65.5,57.85) C1.2@66.4,57.85 ; v1(65.725,45.125) R74.2@65.725,46.025 ; v1(66.225,58.9) C12.1@66.225,59.8 ; v1(67.32,34.975) DA3.5@68.22,34.975 ; ZQ1.2@68.375,61.2 68.375,62.05 v1(68.675,62.35) ; v1(68.425,50.65) C87.1@69.325,50.65 ; C18.1@70.225,88.8 v1(70.225,89.7) ; ZQ1.2@70.575,59.6 71.425,59.6 v1(71.725,59.9) ; C2.2@71.075,57.85 v1(71.975,57.85) ; v1(72.725,58.9) C13.1@72.725,59.8 ; C49.1@73.725,36.575 v1(73.725,37.475) ; R49.2@73.725,40.375 v1(73.725,41.275) ; v1(74.125,58.9) C9.1@74.125,59.8 ; R47.1@74.425,32.7 v1(75.325,32.7) ; C48.1@75.325,36.575 v1(76.225,36.575) ; v1(75.525,58.9) C10.1@75.525,59.8 ; v1(75.675,49.85) R67.1@76.575,49.85 ; DA4.4@77.02,40.375 v1(77.02,41.62) ; v1(77.125,58.9) C11.1@77.125,59.8 ; v1(80.1,63.75) C59.1@81,63.75 ; v1(80.325,58.9) C3.1@80.325,59.8 ; C14.1@81.475,66.55 v1(82.375,66.55) ; C15.1@81.475,73.05 v1(82.375,73.05) ; C16.1@81.475,78.05 v1(82.375,78.05) ; C5.1@81.475,82.55 v1(82.375,82.55) ; C17.1@81.475,83.95 v1(82.375,83.95) ; v1(82.525,37.875) C51.1@82.525,38.775 ; v1(84.125,37.875) C50.1@84.125,38.775 ; C101.1@86.35,85.9 v1(86.35,86.8) ; v1(87.88,51.795) DA8.4@89.125,51.795 ; v1(87.88,60.595) DA7.4@89.125,60.595 ; v1(88.15,76.1) C96.1@88.15,77 ; C95.1@88.15,85.7 v1(88.15,86.6) ; v1(89,75.65) C92.1@89.9,75.65 ; v1(89.3,87.25) C100.1@90.2,87.25 ; v1(89.95,70.5) R81.1@89.95,71.4 ; C61.1@90.725,57.3 v1(91.625,57.3) ; C60.1@90.725,58.9 v1(91.625,58.9) ; C58.1@90.725,66.1 v1(91.625,66.1) ; C57.1@90.725,67.7 v1(91.625,67.7) ; v1(91.35,73.925) C103.1@91.35,74.825 ; v1(92.75,70.5) R92.1@92.75,71.4 ; v1(92.75,73.925) C104.1@92.75,74.825 ; v1(94.15,73.925) C91.1@94.15,74.825 ; C94.1@94.8,88.775 v1(94.8,89.675) ; v1(95.55,73.925) C106.1@95.55,74.825 ; C99.1@96.2,88.775 v1(96.2,89.675) ; v1(96.95,70.5) C105.1@96.95,71.4 ; v1(96.95,73.925) C107.1@96.95,74.825 ; R79.2@97.6,88.775 v1(97.6,89.675) ; R78.2@99,88.775 v1(99,89.675) ; v1(99.75,70.5) R88.2@99.75,71.4 ; v1(101.15,70.5) R90.2@101.15,71.4 ; C98.1@101.45,86.6 v1(101.45,87.5) ; v1(102.55,70.5) R91.2@102.55,71.4 ; C97.1@103.9,80.6 v1(104.8,80.6) ; C93.1@103.9,82 v1(104.8,82) ; C113.1@105.125,74.05 v1(105.125,74.95) ; v1(105.575,68.9) HL6.1@106.475,68.95 ; v1(105.725,82) C102.1@105.725,82.9 ; R69.2@106,46.1 v1(106,47) ; v1(106.975,76.675) VD35.2@107.875,76.675 ; C108.1@107.625,86.6 v1(107.625,87.5) ; v1(108.7,74.85) R106.2@109.6,74.85 ; R68.2@109.025,34.45 v1(109.925,34.45) ; C83.1@109.025,36.05 v1(109.025,37.475) ; R62.1@110.475,31.25 v1(111.375,31.25) ; v1(111.2,70.75) C112.2@111.2,71.65 ; v1(112.125,81.25) R85.2@112.125,82.15 ; R105.2@115.925,72.075 v1(117.025,72.075) ; v1(101.2,43.6) R63.1@101.2,44.5 v1(101.2,43.6)
  Top Layer w0.6: v1(15.275,76.125) 15.275,75.1 v1(21.75,68.625) v1(44.2,68.625) v1(47.275,65.55) v1(50.225,65.55) ; v1(83.95,68.9) v1(104.75,68.9) ; C81.1@102.8,44.5 C82.1@102.8,42.975 102.8,42.3 103.115,41.985 103.115,38.91 v1(103.75,38.275)
  Bottom Layer w0.6: v1(38.325,47.3) v1(39.175,47.3) v1(40.025,47.3) ; v1(72.35,45.475) v1(72.35,46.125) v1(72.35,46.775) ; v1(72.35,52.925) v1(72.35,53.575) v1(72.35,54.225) ; v1(73.85,47.1) v1(74.625,47.875) v1(74.625,47.1) v1(73.85,47.1) ; v1(73.85,52.6) v1(74.625,51.825) v1(74.625,52.6) v1(73.85,52.6)
  other v1: 4,1.85 126,1.85 2.925,2.138 5.075,2.138 124.925,2.138 127.075,2.138 2.138,2.925 5.862,2.925 124.138,2.925 127.862,2.925 1.85,4 6.15,4 123.85,4 128.15,4 2.138,5.075 5.862,5.075 124.138,5.075 127.862,5.075 2.925,5.862 5.075,5.862 124.925,5.862 127.075,5.862 4,6.15 126,6.15 47.25,9.075 50.75,9.075 54.25,9.075 80.75,9.075 84.25,9.075 87.75,9.075 97.775,10.15 99.225,10.15 102.125,10.15 105.025,10.15 107.925,10.15 110.825,10.15 113.725,10.15 115.175,10.15 116.625,10.15 118.075,10.15 119.525,10.15 100.675,11.6 103.575,11.6 106.475,11.6 109.375,11.6 112.275,11.6 113.725,11.6 116.625,11.6 119.525,11.6 96.9,12.3 98.35,12.3 63.75,12.355 64.65,12.355 65.55,12.355 68.35,12.355 69.25,12.355 70.15,12.355 115.175,13.05 116.625,13.05 118.075,13.05 119.525,13.05 119.525,14.5 114.7,15.85 116,15.85 117.3,15.85 119.525,15.95 119.525,17.4 114.7,17.675 116,17.675 117.3,17.675 119.525,18.85 119.525,20.3 114.7,21.325 116,21.325 117.3,21.325 119.525,21.75 60,22.65 70,22.65 126,22.65 58.925,22.938 61.075,22.938 68.925,22.938 71.075,22.938 124.925,22.938 127.075,22.938 110.825,23.2 112.275,23.2 113.725,23.2 116.625,23.2 119.525,23.2 58.138,23.725 61.862,23.725 68.138,23.725 71.862,23.725 124.138,23.725 127.862,23.725 45.5,24 46.4,24 47.3,24 50.1,24 51,24 51.9,24 79,24 79.9,24 80.8,24 83.6,24 84.5,24 85.4,24 88.2,24 89.1,24 90,24 92.8,24 93.7,24 94.6,24 96.75,24.25 97.45,24.25 98.15,24.25 110.825,24.65 112.275,24.65 113.725,24.65 115.175,24.65 116.625,24.65 118.075,24.65 119.525,24.65 57.85,24.8 62.15,24.8 67.85,24.8 72.15,24.8 123.85,24.8 128.15,24.8 58.138,25.875 61.862,25.875 68.138,25.875 71.862,25.875 124.138,25.875 127.862,25.875 58.925,26.662 61.075,26.662 68.925,26.662 71.075,26.662 124.925,26.662 127.075,26.662 60,26.95 70,26.95 126,26.95 55.95,28.875 76.2,28.9 67.675,30.45 96.925,30.725 98.825,30.725 97.875,32 112.225,32.675 113.825,32.675 115.425,32.675 96.925,33.175 98.825,33.175 111.225,33.475 86.425,34.1 88.425,34.1 90.425,34.1 92.425,34.1 112.225,34.275 115.425,34.275 94.175,34.35 96.175,34.35 111.225,35.075 85.325,35.275 87.325,35.275 89.325,35.275 91.325,35.275 97.875,35.275 99.775,35.275 93.075,35.525 95.075,35.525 112.225,35.875 113.825,35.875 115.425,35.875 45.4,36.85 85.325,36.875 87.325,36.875 92.45,36.975 94.175,36.975 96.175,36.975 99.575,36.975 102.55,37.475 104.95,37.475 106.625,37.475 110.625,37.475 112.225,37.475 115.425,37.475 101.35,38.275 113.85,39.025 115.45,39.025 102.55,39.075 104.95,39.075 106.625,39.075 109.025,39.075 112.225,39.075 109.05,40.625 110.65,40.625 112.25,40.625 115.45,40.625 109.05,42.225 112.25,42.225 113.85,42.225 115.45,42.225 45.4,42.675 47.85,42.675 84.625,42.675 97.3,43.35 110.65,43.825 112.25,43.825 115.45,43.825 109.25,43.9 84.625,45.2 109.05,45.425 110.65,45.425 112.25,45.425 113.85,45.425 115.45,45.425 81,45.675 97.3,46.3 77.85,46.75 78.85,46.75 79.85,46.75 81,46.75 109.85,46.775 111.45,46.775 113.05,46.775 114.65,46.775 77.175,47.1 82.8,47.25 75.875,47.325 65.925,49.05 94.425,50.25 65.925,50.65 82.8,50.8 23.375,50.95 106.625,50.95 96.8,51.8 23.375,51.85 106.625,51.85 75.875,52.375 77.175,52.6 23.375,52.75 106.625,52.75 77.85,52.95 78.85,52.95 79.85,52.95 81,52.95 81,54.025 82.8,54.55 23.375,55.55 106.625,55.55 23.375,56.45 106.625,56.45 23.375,57.35 106.625,57.35 96.8,57.5 33.2,58.125 23.375,60.15 106.625,60.15 96.8,60.6 33.2,60.85 23.375,61.05 106.625,61.05 23.375,61.95 106.625,61.95 23.375,64.75 106.625,64.75 23.375,65.65 106.625,65.65 23.375,66.55 106.625,66.55 26.75,68.625 31.75,68.625 36.75,68.625 41.75,68.625 88.95,68.9 93.95,68.9 99.75,68.9 18.325,72.025 24.95,80.25 27.15,80.25 29.35,80.25 30.45,80.25 32.65,80.25 90.95,80.25 93.15,80.25 95.35,80.25 96.45,80.25 98.65,80.25 24.95,81.35 26.05,81.35 27.15,81.35 28.25,81.35 29.35,81.35 30.45,81.35 31.55,81.35 32.65,81.35 90.95,81.35 92.05,81.35 93.15,81.35 94.25,81.35 95.35,81.35 96.45,81.35 97.55,81.35 98.65,81.35 24.95,82.45 27.15,82.45 28.25,82.45 29.35,82.45 30.45,82.45 31.55,82.45 90.95,82.45 93.15,82.45 95.35,82.45 96.45,82.45 97.55,82.45 24.95,83.55 26.05,83.55 28.25,83.55 30.45,83.55 31.55,83.55 90.95,83.55 92.05,83.55 94.25,83.55 96.45,83.55 97.55,83.55 4,92.65 2.925,92.938 5.075,92.938 2.138,93.725 5.862,93.725 1.85,94.8 6.15,94.8 2.138,95.875 5.862,95.875 2.925,96.662 5.075,96.662 4,96.95
  other v2: 4,22.65 2.925,22.938 5.075,22.938 2.138,23.725 5.862,23.725 1.85,24.8 6.15,24.8 2.138,25.875 5.862,25.875 2.925,26.662 5.075,26.662 4,26.95 71.95,49.025 72.775,49.025 73.6,49.85 71.95,50.675 72.775,50.675 60,92.65 70,92.65 126,92.65 58.925,92.938 61.075,92.938 68.925,92.938 71.075,92.938 124.925,92.938 127.075,92.938 58.138,93.725 61.862,93.725 68.138,93.725 71.862,93.725 124.138,93.725 127.862,93.725 57.85,94.8 62.15,94.8 67.85,94.8 72.15,94.8 123.85,94.8 128.15,94.8 58.138,95.875 61.862,95.875 68.138,95.875 71.862,95.875 124.138,95.875 127.862,95.875 58.925,96.662 61.075,96.662 68.925,96.662 71.075,96.662 124.925,96.662 127.075,96.662 60,96.95 70,96.95 126,96.95
GND_IF: C66.2 C67.1 C68.1 C69.1 C71.1 DA9.9 DA9.16 FV1.2 FV2.2 VD25.2 VD27.2 VD28.2 VD30.2 X10.3 | length 7.8
  Top Layer w0.45: v1(20.825,35.975) C69.1@21.725,35.975 ; v1(21.075,37.8) C68.1@21.975,37.8 ; v1(26.505,34.78) DA9.9@26.505,36.025 ; DA9.16@35.395,36.025 v1(35.395,37.27) ; C67.1@36.237,32.512 v1(37.137,32.512) ; C66.2@36.237,34.112 v1(37.137,34.112)
  Bottom Layer w0.6: v1(38.325,34.5) v1(39.175,34.5) v1(40.025,34.5)
  other v1: 22.3,24 23.2,24 24.1,24 26.9,24 27.8,24 28.7,24 17.875,27.5 18.775,27.5 19.675,27.5 31.325,27.5 32.225,27.5 33.125,27.5
HSE_IN: C1.1 DD1.23 ZQ1.1 | length 6.5
  Top Layer w0.125: C1.1@68,57.85 68,59.225 ZQ1.1@68.375,59.6 68.475,59.6 69.375,60.5 69.375,61.925 69.225,62.075 DD1.23@69.225,63.675
HSE_OUT: C2.1 DD1.24 ZQ1.3 | length 6.6
  Top Layer w0.125: C2.1@69.475,57.85 69.475,60.2 ZQ1.3@70.475,61.2 ; DD1.24@69.725,63.675 69.725,61.95 ZQ1.3@70.475,61.2 ; ZQ1.3@70.575,61.2 ZQ1.3@70.475,61.2
INC_ENC_1_A: DD2.35 R53.2 | length 22.9
  Top Layer w0.125: DD2.35@32.2,78.75 32.2,77.975 32.85,77.325 32.85,71.025 v1(33.375,70.5) ; R53.2@44.925,65.475 v1(44.925,66.375)
  Bottom Layer w0.125: v1(33.375,70.5) 35.825,68.05 43.25,68.05 v1(44.925,66.375)
INC_ENC_1_A_N: FU13.3 X8.3 | length 16.7
  Top Layer w0.25: X8.3@7.5,78.5 11.75,74.25 11.75,67.1 13.2,65.65 FU13.3@14.675,65.65
INC_ENC_1_A_P: FU11.3 X8.2 | length 27
  Top Layer w0.25: X8.2@7.5,82 6,80.5 6,77.575 6.725,76.85 8.55,76.85 11.325,74.075 11.325,63.075 13.35,61.05 FU11.3@14.675,61.05
INC_ENC_1_B: DD2.34 R52.2 | length 23.1
  Top Layer w0.125: DD2.34@31.8,78.75 31.8,78 32.6,77.2 32.6,71.025 v1(32.075,70.5) ; R52.2@43.325,65.475 v1(43.325,67.125)
  Bottom Layer w0.125: v1(32.075,70.5) 34.775,67.8 42.65,67.8 v1(43.325,67.125)
INC_ENC_1_B_N: FU15.3 X8.5 | length 18.9
  Top Layer w0.25: X8.5@7.5,71.5 10.65,68.35 10.65,59 13.2,56.45 FU15.3@14.675,56.45
INC_ENC_1_B_P: FU14.3 X8.4 | length 29.3
  Top Layer w0.25: X8.4@7.5,75 6,73.5 6,70.575 6.725,69.85 8.5,69.85 10.225,68.125 10.225,54.825 13.2,51.85 FU14.3@14.675,51.85
INC_ENC_2_A: DD6.35 R57.2 | length 33.9
  Top Layer w0.125: R57.2@85.55,67.7 v1(86.45,67.7) ; v1(86.45,70) 86.75,69.7 102.932,69.7 103.575,70.343 103.575,76.925 102.65,77.85 98.35,77.85 98.2,78 DD6.35@98.2,78.75
  Bottom Layer w0.125: v1(86.45,67.7) v1(86.45,70)
INC_ENC_2_A_N: FU18.3 X9.3 | length 21.4
  Top Layer w0.25: FU18.3@115.325,61.05 v1(116.825,61.05)
  Bottom Layer w0.25: v1(116.825,61.05) 115.575,62.3 115.575,72.475 118.1,75 X9.3@122.5,75
INC_ENC_2_A_P: FU16.3 X9.2 | length 13.2
  Top Layer w0.25: FU16.3@115.325,65.65 v1(116.825,65.65)
  Bottom Layer w0.25: v1(116.825,65.65) 116.05,66.425 116.05,69.95 117.6,71.5 X9.2@122.5,71.5
INC_ENC_2_B: DD6.34 R56.2 | length 35.4
  Top Layer w0.125: R56.2@85.55,66.1 v1(86.45,66.1) ; v1(87.075,70.5) 87.625,69.95 102.829,69.95 103.325,70.446 103.325,76.775 102.5,77.6 98.2,77.6 97.8,78 DD6.34@97.8,78.75
  Bottom Layer w0.125: v1(86.45,66.1) 87.075,66.725 v1(87.075,70.5)
INC_ENC_2_B_N: FU20.3 X9.5 | length 38.7
  Top Layer w0.25: FU20.3@115.325,51.85 v1(116.825,51.85)
  Bottom Layer w0.25: v1(116.825,51.85) 114.625,54.05 114.625,79.025 117.6,82 X9.5@122.5,82
INC_ENC_2_B_P: FU19.3 X9.4 | length 30.2
  Top Layer w0.25: FU19.3@115.325,56.45 v1(116.825,56.45)
  Bottom Layer w0.25: v1(116.825,56.45) 115.1,58.175 115.1,76 117.6,78.5 X9.4@122.5,78.5
LSE_IN: C7.1 DD1.8 ZQ2.2 | length 5.9
  Top Layer w0.125: C7.1@58.875,61.4 60.5,61.4 ZQ2.2@60.5,60.9 61.35,60.9 61.725,61.275 DD1.8@61.725,63.675
LSE_OUT: C8.1 DD1.9 ZQ2.1 | length 5.2
  Top Layer w0.125: DD1.9@62.225,63.675 62.225,62.825 63,62.05 ZQ2.1@63,61.4 ; C8.1@64.625,61.4 ZQ2.1@63,61.4 ; ZQ2.1@63,61.4 ZQ2.1@63,60.9 ZQ2.1@63,61.4
MCU_LED1: DD1.127 DD7.1 HL1.1 | length 39.4
  Top Layer w0.125: HL1.1@50.35,74.05 DD1.127@56.35,74.05 v1(58.6,74.05) ; v1(56.925,60.05) 56.925,59.025 55.463,57.563 55.463,50.316 56.079,49.7 57.45,49.7 59.075,49.7 59.625,49.15 DD7.1@59.625,47.925
  Bottom Layer w0.125: v1(56.925,60.05) 56.925,60.65 56.675,60.9 56.675,65.4 58.6,67.325 v1(58.6,74.05)
MCU_LED2: DD1.129 DD7.3 HL2.1 | length 36.9
  Top Layer w0.125: HL2.1@50.35,72.45 50.95,73.05 DD1.129@56.35,73.05 v1(58.1,73.05) ; v1(56.425,59.425) 56.425,58.9 55.213,57.688 55.213,50.212 55.975,49.45 57.85,49.45 58.325,48.975 DD7.3@58.325,47.925
  Bottom Layer w0.125: v1(56.425,59.425) 56.425,65.525 58.35,67.45 58.35,71.104 58.1,71.354 v1(58.1,73.05)
MCU_LED3: DD1.132 DD8.1 HL3.1 | length 32.8
  Top Layer w0.125: HL3.1@50.35,70.85 50.875,71.375 55.1,71.375 55.275,71.55 DD1.132@56.35,71.55 v1(57.55,71.55) ; DD8.1@54.5,47.925 54.5,48.6 54.963,49.063 54.963,57.838 55.925,58.8 v1(55.925,60.05)
  Bottom Layer w0.125: v1(55.925,60.05) 55.925,60.65 56.175,60.9 56.175,65.65 58.1,67.575 58.1,71 v1(57.55,71.55)
MCU_nRST: C3.2 DD1.25 R11.2 R36.2 R70.2 R94.2 X1.15 | length 149.6
  Top Layer w0.125: v1(39.525,73.625) v1(39.525,77.5) ; v1(41.625,81.25) R36.2@41.625,82.15 ; v1(57.55,69.3) v1(59.125,69.3) ; DD1.25@70.225,63.675 v1(70.225,65.65) v1(75.375,65.65) 78.1,62.925 79.9,62.925 80.325,62.5 C3.2@80.325,61.4 R11.2@81.925,61.4 R70.2@83.525,61.4 ; v1(107.625,81.25) R94.2@107.625,82.15
  Bottom Layer w0.125: X1.15@8.27,54.55 9.5,55.78 9.5,62.075 20.15,72.725 30.7,72.725 32.325,74.35 38.8,74.35 v1(39.525,73.625) 44.4,73.625 45.575,72.45 45.575,68.625 45.925,68.275 49.719,68.275 50.744,69.3 v1(57.55,69.3) ; v1(39.525,77.5) 41.625,79.6 v1(41.625,81.25) ; v1(59.125,69.3) 66.575,69.3 v1(70.225,65.65) ; v1(75.375,65.65) 79.1,69.375 82.8,69.375 88.55,75.125 102.6,75.125 103.25,75.775 103.25,79.9 104.6,81.25 v1(107.625,81.25)
MCU_TCK_SWCLK: DD1.109 R13.1 X1.9 | length 78.1
  Top Layer w0.125: v1(40.425,72.95) 43.85,76.375 47.775,76.375 51.775,80.375 51.775,82.675 52.125,83.025 56.325,83.025 DD1.109@56.35,83.05 v1(57.4,83.05) ; R13.1@54.075,84.925 v1(56.975,84.925)
  Bottom Layer w0.125: X1.9@8.27,46.93 10,48.66 10,61.825 20.4,72.225 37.925,72.225 38.65,72.95 v1(40.425,72.95) ; v1(56.975,84.925) 57.4,84.5 v1(57.4,83.05)
MCU_TDI: R9.2 R14.1 X1.5 | length 81.1
  Top Layer w0.125: v1(39.925,71.7) 44.325,76.1 47.875,76.1 52.475,80.7 v1(52.475,81.275) R14.1@52.475,82.175 ; R9.2@52.475,75.05 51.5,75.05 51.075,75.475 51.075,77.825 52.875,79.625 v1(53.45,79.625)
  Bottom Layer w0.125: X1.5@8.27,41.85 10.5,44.08 10.5,61.575 20.625,71.7 v1(39.925,71.7) ; v1(52.475,81.275) 52.475,80.6 v1(53.45,79.625)
MCU_TDO: DD1.133 R4.2 X1.13 | length 65.6
  Top Layer w0.125: v1(38.525,71.075) v1(38.525,73.625) ; v1(42.625,71.075) 43.925,69.775 53.2,69.775 R4.2@54.075,70.65 54.725,70.65 55.125,71.05 DD1.133@56.35,71.05
  Bottom Layer w0.125: X1.13@8.27,52.01 9.75,53.49 9.75,61.95 20.275,72.475 37.375,72.475 v1(38.525,73.625) ; v1(38.525,71.075) v1(42.625,71.075)
MCU_TMS_SWDIO: DD1.105 R7.2 X1.7 | length 82.2
  Top Layer w0.125: v1(39.075,72.325) 43.4,76.65 47.675,76.65 51.525,80.5 51.525,82.85 52.225,83.55 58.075,83.55 58.35,83.275 59.225,83.275 59.725,83.775 DD1.105@59.725,84.925 59.725,85.725 60.625,86.625 R7.2@60.625,87.2
  Bottom Layer w0.125: X1.7@8.27,44.39 10.25,46.37 10.25,61.7 20.525,71.975 38.725,71.975 v1(39.075,72.325)
MCU_TRST: DD1.134 X1.3 | length 74.1
  Top Layer w0.125: v1(42.125,70.45) 43.05,69.525 54.4,69.525 55.425,70.55 DD1.134@56.35,70.55
  Bottom Layer w0.125: X1.3@8.27,39.31 10.75,41.79 10.75,61.45 20.725,71.425 37.15,71.425 38.125,70.45 v1(42.125,70.45)
NetC4_2: C4.2 DD1.6 | length 15.3
  Top Layer w0.25: DD1.6@60.725,63.675 v1(60.725,64.875)
  Bottom Layer w0.6: C4.2@57.274,54.563 59.663,54.563 61.925,56.825 61.925,63.675 v1(60.725,64.875)
NetC5_2: C5.2 C6.2 DD1.71 DD1.106 | length 4.5
  Top Layer w0.25: DD1.106@59.225,84.925 v1(59.225,86.3) ; DD1.71@77.6,82.55 v1(78.975,82.55)
  Top Layer w0.45: v1(59.225,86.3) C6.2@59.225,87.2 ; v1(78.975,82.55) C5.2@79.875,82.55
NetC26_2: C26.2 DD2.15 | length 1.6
  Top Layer w0.17: 23.9,77.825 24.2,78.125 DD2.15@24.2,78.75
  Top Layer w0.45: C26.2@23.9,77.25 23.9,77.825
NetC27_2: C27.2 DD2.45 | length 2.5
  Top Layer w0.17: DD2.45@33.95,81.7 34.85,81.7
  Top Layer w0.45: 34.85,81.7 35.075,81.7 35.375,82 C27.2@36.3,82
NetC28_2: C28.2 DD2.63 | length 2.4
  Top Layer w0.17: C28.2@28.8,87.175 C28.2@28.875,87.175 ; DD2.63@29.4,85.05 29.4,85.95
  Top Layer w0.45: C28.2@28.8,87.175 29.4,86.575 29.4,85.95
NetC29_1: C29.1 DD3.4 L2.1 R19.1 | length 6.5
  Top Layer w0.125: R19.1@44.575,77.625 44.575,78.275 44.725,78.425 46.05,78.425 46.2,78.575 L2.1@46.2,79.225
  Top Layer w0.25: L2.1@46.2,79.225 C29.1@46.2,80.825 DD3.4@48.025,80.825
NetC70_1: C70.1 C71.2
NetC72_2: C72.2 C73.2 L4.1 VD31.1
NetC76_1: C76.1 DA10.8 L5.1 VD32.1
NetC76_2: C76.2 DA10.1 | length 5.5
  Top Layer w0.45: v1(100.3,39.075) C76.2@100.3,39.975 ; v1(101.025,35.575) DA10.1@101.845,35.575
  Bottom Layer w0.45: v1(100.3,39.075) 100.3,36.3 v1(101.025,35.575)
NetC81_2: C81.2 R65.2 | length 1.6
  Top Layer w0.25: C81.2@102.8,46.1 R65.2@104.4,46.1
NetC82_2: C82.2 DA10.6 R65.1 | length 3.5
  Top Layer w0.25: DA10.6@104.385,40.975 104.393,40.982 104.393,42.967 C82.2@104.4,42.975 R65.1@104.4,44.5
NetC83_2: C83.2 DA10.4 | length 2
  Top Layer w0.25: DA10.4@105.655,35.575 106.25,35.575 106.725,36.05 C83.2@107.425,36.05
NetC87_2: C87.2 DA11.15 R72.1 | length 3.7
  Top Layer w0.3: R72.1@67.325,49.05 C87.2@69.325,49.05 69.405,49.05 69.88,49.525 DA11.15@70.875,49.525
NetC92_2: C92.2 DD6.15 | length 1.5
  Top Layer w0.17: 89.9,77.825 90.2,78.125 DD6.15@90.2,78.65
  Top Layer w0.45: C92.2@89.9,77.25 89.9,77.825
NetC93_2: C93.2 DD6.45 | length 2.5
  Top Layer w0.17: DD6.45@99.95,81.7 100.85,81.7
  Top Layer w0.45: 100.85,81.7 101.075,81.7 101.375,82 C93.2@102.3,82
NetC94_2: C94.2 DD6.63 | length 2.4
  Top Layer w0.17: DD6.63@95.4,85.05 95.4,85.95
  Top Layer w0.45: C94.2@94.8,87.175 95.4,86.575 95.4,85.95
NetC112_1: C112.1 DD10.1 R103.1 | length 4.2
  Top Layer w0.125: DD10.1@107.925,74.35 107.925,73.475 108.15,73.25 R103.1@109.6,73.25 C112.1@109.6,71.65
NetDA1_2: DA1.2 R38.1 | length 7.2
  Top Layer w0.125: DA1.2@50.81,40.375 50.81,41.535 51.25,41.975 54.925,41.975 55.375,41.525 R38.1@55.375,40.375
NetDA1_6: DA1.6 FU1.1 R37.1 R39.2 VD1.1 VD2.1 | length 23.2
  Top Layer w0.25: VD2.1@46.31,29.45 48.2,29.45 48.575,29.075 48.575,21.6 48.215,21.24 VD1.1@46.4,21.24 FU1.1@46.4,18.25 ; VD2.1@46.49,29.45 46.49,31.24 46.85,31.6 47.375,31.6 47.675,31.9 R37.1@47.675,32.7 R39.2@49.275,32.7 49.275,33.675 49.525,33.925 DA1.6@49.525,34.96
NetDA1_7: DA1.7 FU3.1 R39.1 R40.2 VD2.2 VD3.1 | length 22.5
  Top Layer w0.25: DA1.7@50.81,34.975 50.81,33.94 51.06,33.69 R39.1@51.06,32.715 ; FU3.1@51,18.25 VD3.1@51,21.24 52.815,21.24 53.175,21.6 53.175,29.075 52.8,29.45 VD2.2@50.91,29.45 51.075,29.615 R39.1@51.075,32.7 R40.2@52.675,32.7
NetDA2_7: DA2.7 FU6.1 R43.2 VD5.2 VD6.1 | length 40
  Top Layer w0.25: v1(56.54,31.625) VD5.2@58.04,31.625 58.04,33.24 58.425,33.625 59.35,33.625 59.61,33.885 DA2.7@59.61,34.975 59.61,36.16 59.925,36.475 R43.2@62.775,36.475 ; FU6.1@60.2,18.25 v1(60.2,19.75) ; VD6.1@69.25,18.435 v1(69.25,19.935)
  Bottom Layer w0.25: v1(56.54,31.625) 54.9,29.985 54.9,21.55 56.7,19.75 v1(60.2,19.75) 62.75,19.75 63.6,20.6 65.65,20.6 66.315,19.935 v1(69.25,19.935)
NetDA2_8: DA2.8 FU5.1 R43.1 VD4.1 VD5.1 | length 41.5
  Top Layer w0.25: FU5.1@55.6,18.25 v1(55.6,19.75) ; DA2.8@60.88,34.975 61.52,34.975 61.82,34.675 R43.1@62.775,34.675 62.775,33.925 62.46,33.61 VD5.1@62.46,31.625 v1(63.96,31.625) ; VD4.1@64.65,18.435 v1(64.65,19.935)
  Bottom Layer w0.25: v1(63.96,31.625) 63.26,32.325 56.2,32.325 54.2,30.325 54.2,21.15 v1(55.6,19.75) 56.375,18.975 63.69,18.975 v1(64.65,19.935)
NetDA3_2: DA3.2 R45.1 | length 7.2
  Top Layer w0.125: DA3.2@70.76,40.375 70.76,41.535 71.2,41.975 74.875,41.975 75.325,41.525 R45.1@75.325,40.375
NetDA3_6: DA3.6 FU7.1 R44.1 R46.2 VD7.1 VD8.1 | length 31.7
  Top Layer w0.25: R44.1@67.625,32.7 R46.2@69.225,32.7 ; DA3.6@69.475,34.96 69.475,33.925 69.225,33.675 R46.2@69.225,32.7 ; FU7.1@79.9,18.25 VD7.1@79.9,21.24 81.715,21.24 82.075,21.6 82.075,29.075 81.7,29.45 VD8.1@79.99,29.45 78.55,29.45 77,31 69.9,31 69.225,31.675 R46.2@69.225,32.7
NetDA3_7: DA3.7 FU8.1 R46.1 R47.2 VD8.2 VD9.1 | length 33.8
  Top Layer w0.25: DA3.7@70.76,34.975 70.76,33.94 71.01,33.69 R46.1@71.01,32.715 ; R46.1@71.025,32.7 R47.2@72.625,32.7 72.625,31.7 72.825,31.5 84.05,31.5 84.41,31.14 VD8.2@84.41,29.485 ; VD8.2@84.16,29.485 VD8.2@84.41,29.485 ; VD9.1@84.25,21.275 86.065,21.275 86.425,21.635 86.425,29.11 86.05,29.485 VD8.2@84.41,29.485 ; FU8.1@84.5,18.25 VD9.1@84.5,21.24
NetDA4_7: DA4.7 FU10.1 R50.2 VD11.2 VD12.1 | length 36.5
  Top Layer w0.25: DA4.7@79.56,34.975 79.56,36.16 79.875,36.475 R50.2@82.725,36.475 83.775,36.475 84.025,36.225 84.025,32.8 84.45,32.375 92.34,32.375 93.61,31.105 VD11.2@93.61,29.45 95.5,29.45 95.875,29.075 95.875,21.6 95.515,21.24 VD12.1@93.7,21.24 FU10.1@93.7,18.25
NetDA4_8: DA4.8 FU9.1 R50.1 VD10.1 VD11.1 | length 28.1
  Top Layer w0.25: DA4.8@80.83,34.975 81.47,34.975 81.77,34.675 R50.1@82.725,34.675 82.725,32.525 83.3,31.95 88.345,31.95 89.19,31.105 VD11.1@89.19,29.45 ; VD11.1@89.01,29.45 VD11.1@89.19,29.45 ; FU9.1@89.1,18.25 VD10.1@89.1,21.24 90.915,21.24 91.275,21.6 91.275,29.075 90.9,29.45 VD11.1@89.19,29.45
NetDA5_2: DA5.2 DD4.3 | length 7.6
  Top Layer w0.125: DA5.2@40.875,64.39 42.135,64.39 42.425,64.1 42.425,61.475 42.825,61.075 44.6,61.075 44.775,60.9 DD4.3@44.775,60.2
NetDA5_7: DA5.7 FU13.1 R51.2 VD14.2 VD15.1 | length 21.6
  Top Layer w0.25: FU13.1@18.725,65.65 18.725,63.552 18.935,63.342 25.935,63.342 26.135,63.542 VD15.1@26.135,65.65 27.375,65.65 28.365,64.66 VD14.2@29.925,64.66 33.19,64.66 R51.2@33.2,64.65 ; R51.2@33.2,64.655 34.175,64.655 34.425,64.405 DA5.7@35.46,64.405